# EAGLE board led_strip_II (EAGLE 5.11)
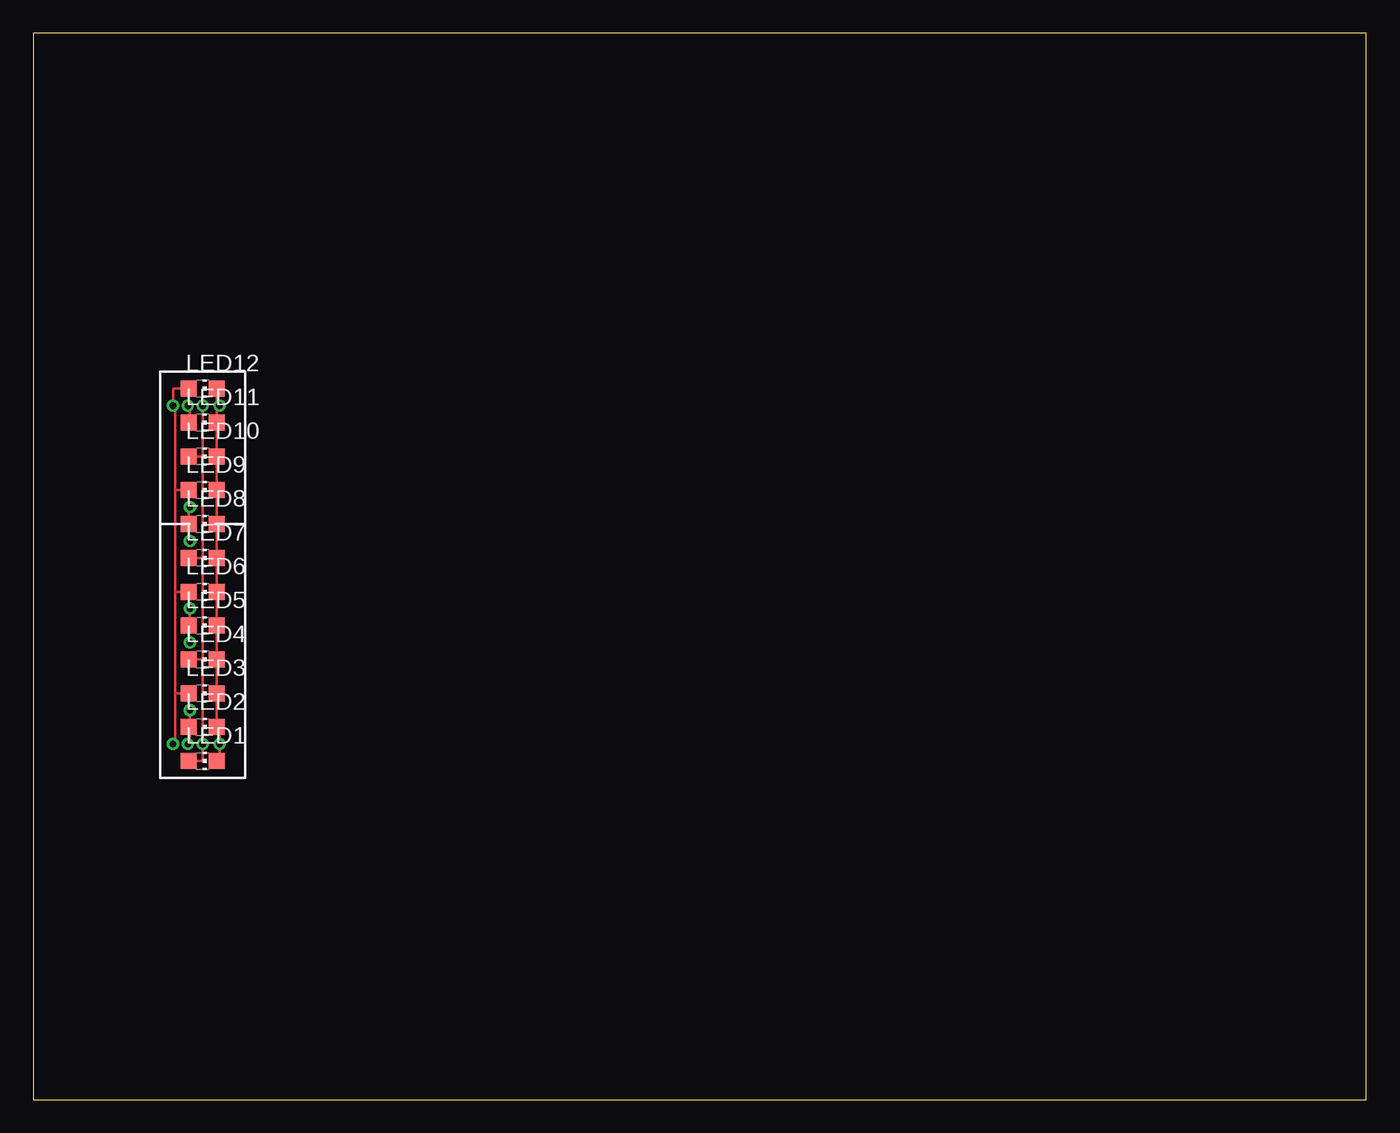
[diagram p0: board, top side]
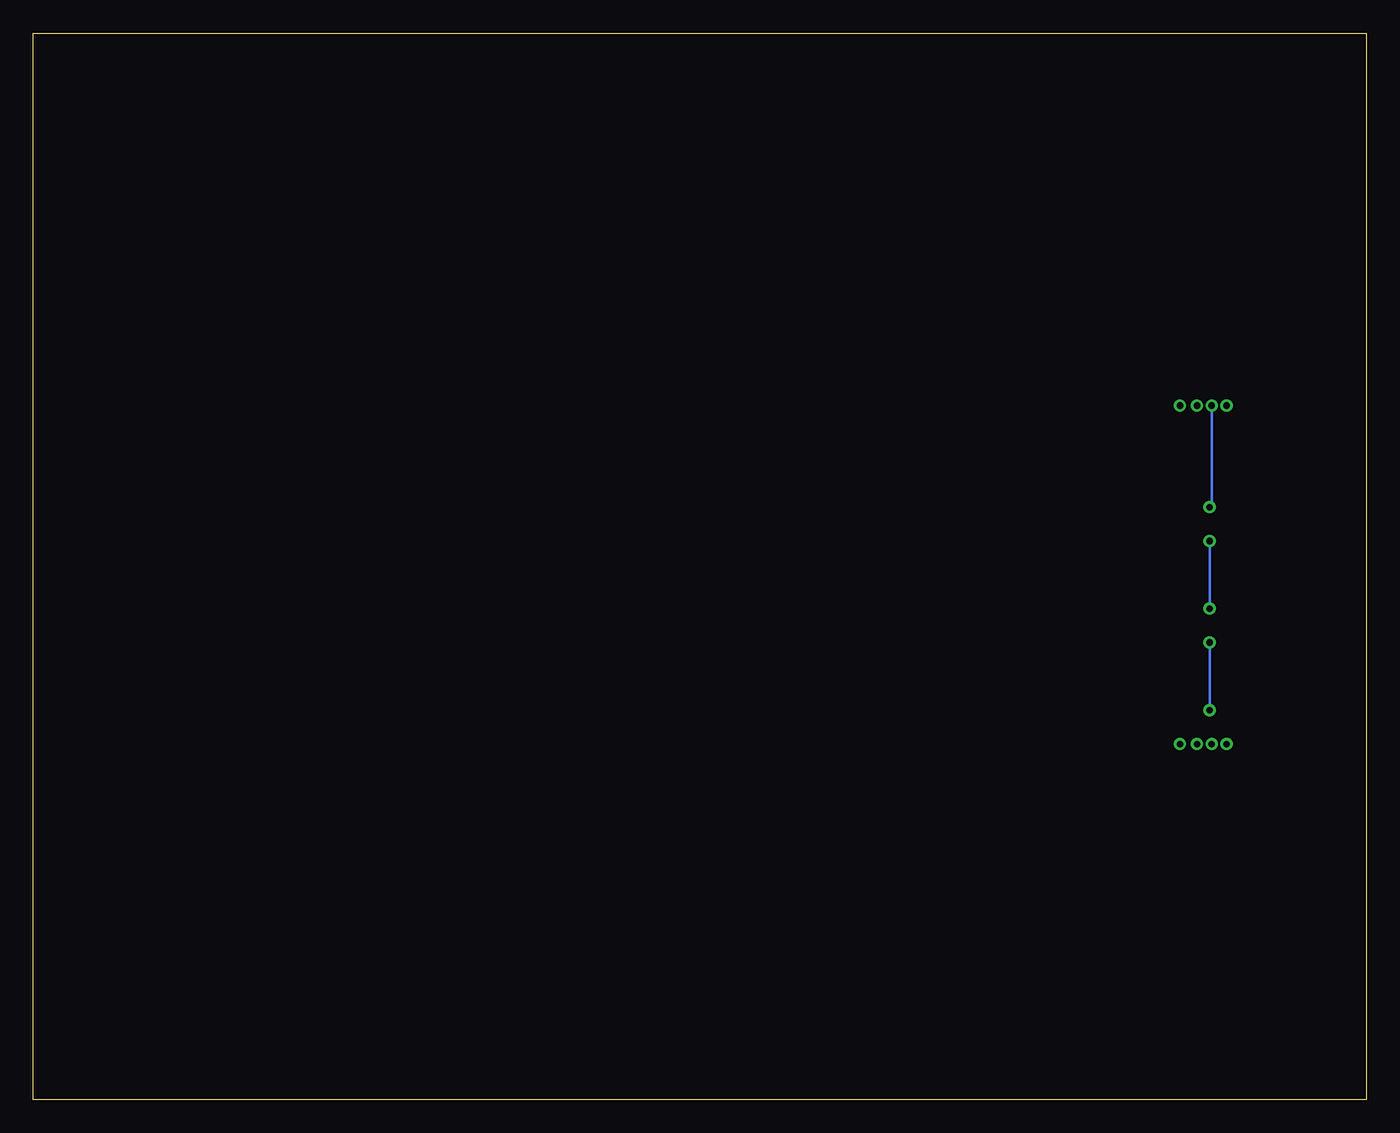
[diagram p1: board, bottom side, seen from below]

Size 100 x 80 mm. Coordinates in mm from the lower left corner, seen from the top.
Outline: 0,0 100,0 100,80 0,80 0,0
Copper layers (1*16): Top 0.035mm / dielectric 1.5mm / Bottom 0.035mm
Design rules "default *": minimum track width 8mil, minimum drill 19mil, track to track 8mil, track to pad 8mil, pad to pad 8mil, via to via 8mil, smd to smd 8mil, copper to edge 40mil, drill to drill 8mil, minimum pad ring 10mil, minimum via ring 8mil, stop-mask expansion 4mil, vias tented up to drill 0mil, thermal gap 10mil

## Footprints (pad centres in the part's own frame; a part is rotated, then mirrored left to right if it is on the bottom)
CHIP-LED0805 = smd 1.2 x 1.2: A 0,-1.05; C 0,1.05

## Placement (x,y rotation side)
LED1  [CHIP-LED0805]  12.7,25.4 270 top
LED2  [CHIP-LED0805]  12.7,27.94 270 top
LED3  [CHIP-LED0805]  12.7,30.48 270 top
LED4  [CHIP-LED0805]  12.7,33.02 270 top
LED5  [CHIP-LED0805]  12.7,35.56 270 top
LED6  [CHIP-LED0805]  12.7,38.1 270 top
LED7  [CHIP-LED0805]  12.7,40.64 270 top
LED8  [CHIP-LED0805]  12.7,43.18 270 top
LED9  [CHIP-LED0805]  12.7,45.72 270 top
LED10  [CHIP-LED0805]  12.7,48.26 270 top
LED11  [CHIP-LED0805]  12.7,50.8 270 top
LED12  [CHIP-LED0805]  12.7,53.34 270 top

## Library data of the parts
LED1-LED12 = led

## Nets
GND: LED1.C LED2.C LED3.C LED4.C LED5.C LED6.C LED7.C LED8.C LED9.C LED10.C LED11.C LED12.C
NET1: LED1.A LED4.A LED7.A LED10.A
NET2: LED2.A LED5.A LED8.A LED11.A
NET3: LED3.A LED6.A LED9.A LED12.A

## Tracks (layer width: path | path; a pad name or v marks a point on that pad's centre or on a via)
GND  (via drill 0.5)
  Top 0.203: LED1.C 13.97,25.4 v13.97,26.67 13.97,27.72 LED2.C LED3.C LED4.C LED5.C LED6.C LED7.C LED8.C LED9.C LED10.C LED11.C 13.75,52.07 | 13.75,52.07 LED12.C | 13.75,52.07 v13.97,52.07
NET1  (via drill 0.5)
  Top 0.203: 11.87,48.26 11.65,48.48 LED10.A 12.7,48.26 | LED1.A 12.7,25.4 v12.7,26.67 12.7,33.02 | 12.7,33.02 LED4.A | 12.7,33.02 12.7,40.64 | 12.7,40.64 LED7.A | 12.7,40.64 12.7,48.26 | 12.7,48.26 v12.7,52.07
NET2  (via drill 0.5)
  Top 0.203: LED11.A 11.75,50.9 11.75,52.07 v11.59,52.07 | v11.75,44.45 11.65,44.35 LED8.A 11.65,42.01 v11.75,41.91 | 11.75,28.04 LED2.A | v11.75,34.29 11.65,34.39 LED5.A 11.75,35.66 v11.75,36.83 | 11.75,28.04 v11.75,29.21 | 11.75,28.04 11.75,26.67 v11.59,26.67
  Bottom 0.203: v11.75,29.21 v11.75,34.29 | v11.75,36.83 v11.75,41.91 | v11.59,52.07 11.59,44.45 v11.75,44.45
NET3  (via drill 0.5)
  Top 0.203: 10.64,45.72 LED9.A | 10.64,38.1 10.64,45.72 | 10.64,38.1 LED6.A | 10.64,30.48 10.64,38.1 | 10.64,30.48 LED3.A | 10.64,30.48 10.64,26.67 v10.48,26.67 | 10.64,45.72 10.64,52.07 v10.48,52.07 10.48,53.34 LED12.A